# Altium PCB Sensor Interface.PcbDoc
Units mm, origin at the board's own origin, x right, y up, seen from the top; angles counter-clockwise.
Board outline 91 x 58 mm, 2 copper layers (Top Layer, Bottom Layer); 26 components, 19 nets, 82 pads, 24 vias.
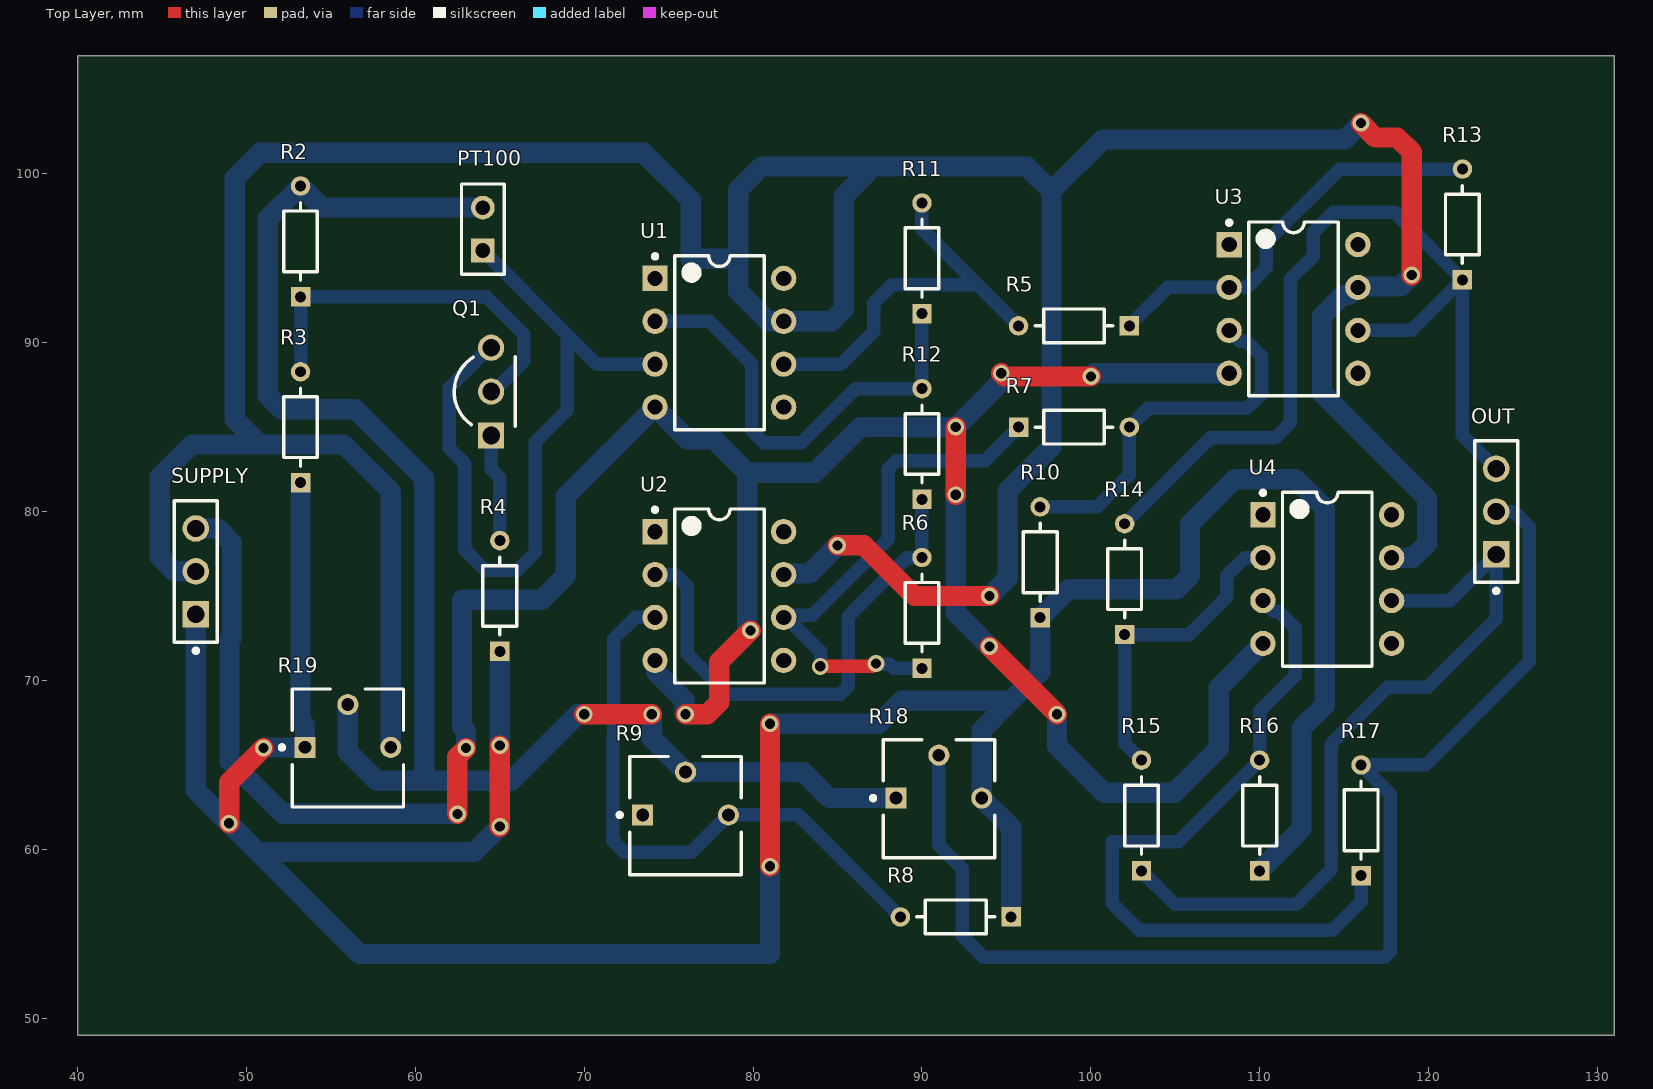
[diagram p0: Top Layer view]
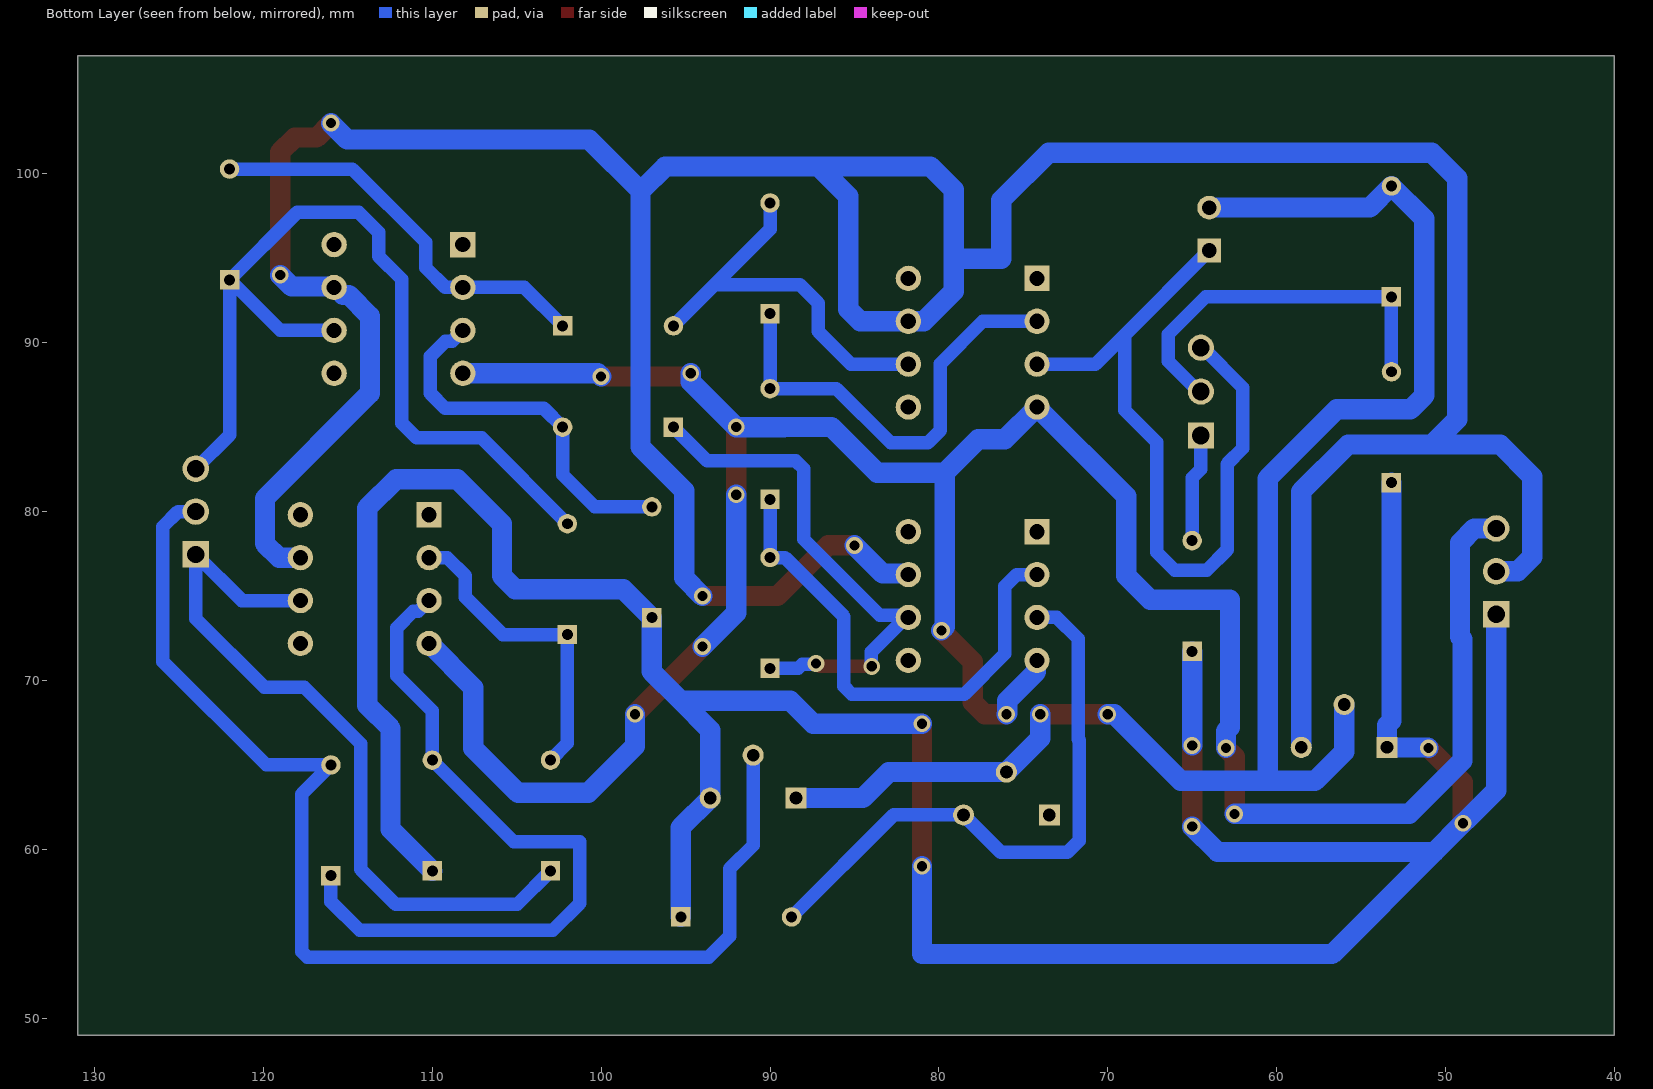
[diagram p1: Bottom Layer view, seen from below]

## Layer stack, top to bottom
Top Solder: solder mask 0.0102, Solder Resist, Dk 3.5
Top Layer: signal copper 0.0356
Dielectric 1: dielectric 0.32, FR-4, Dk 4.8
Bottom Layer: signal copper 0.0356
Bottom Solder: solder mask 0.0102, Solder Resist, Dk 3.5

## Board outline
40,49 131,49 131,107 40,107

## Design rules (kind name [scope] priority, off if disabled: settings)
Clearance [All] p1: gap=0.75 ignorepadtopadclearanceinfootprint=FALSE
PolygonConnect [All] p1: connectstyle=Relief reliefconductorwidth=0.254 reliefentries=4 polygonreliefangle="90 Angle" airgapwidth=0.254
RoutingVias [All] p1: holewidth=0.6 width=1 viastyle="Through Hole" minholewidth=0.6 minwidth=1 maxholewidth=0.6 maxwidth=1
SolderMaskExpansion [All] p1: expansion=0.102 istentingtop=FALSE
Width Width_Power [(InNet('-12') OR InNet('+5') OR InNet('+12') OR InNet('GND'))] p1: maxlimit=1.2 minlimit=1.2 preferedwidth=1.2
Width [All] p2: maxlimit=0.9 minlimit=0.3 preferedwidth=0.3
30 further rules are at their usual default settings.

## Components (designator, comment, footprint, x,y, rotation, side; value= is the part's Value field where it differs from the comment)
OUT "SSQ-103-01-T-S" FP-SSQ-103-01-T-S-MFG 124,80 r90 top
PT100 "SLW-102-01-T-S" SMTC-SLW-102-01-X-S 64,95.46 r90 top
Q1 "PN2222ATF" FAIR-TO-92-3 64.486,87.104 r90 top
R2 "CF18JT2K20" FP-CF18-MFG 53.2,96 r90 top value=2kΩ
R3 "CF18JT2K20" FP-CF18-MFG 53.2,85 r90 top value=1kΩ
R4 "CF18JT2K20" FP-CF18-MFG 65,75 r90 top value=1kΩ
R5 "CF18JT2K20" FP-CF18-MFG 99,91 r180 top value=2.2kΩ
R6 "CF18JT2K20" FP-CF18-MFG 90,74 r90 top value=2.2kΩ
R7 "CF18JT2K20" FP-CF18-MFG 99,85 r0 top value=2.2kΩ
R8 "CF18JT2K20" FP-CF18-MFG 92,56 r180 top value=2.2kΩ
R9 "3362P-1-104LF" BOUR-3362P 76,62 r0 top
R10 "CF18JT2K20" FP-CF18-MFG 97,77 r90 top value=2.2kΩ
R11 "CF18JT2K20" FP-CF18-MFG 90,95 r90 top value=2.2kΩ
R12 "CF18JT2K20" FP-CF18-MFG 90,84 r90 top value=2.2kΩ
R13 "CF18JT2K20" FP-CF18-MFG 122,97 r90 top value=2.2kΩ
R14 "CF18JT2K20" FP-CF18-MFG 102,76 r90 top value=2.2kΩ
R15 "CF18JT2K20" FP-CF18-MFG 103,62 r90 top value=2.2kΩ
R16 "CF18JT2K20" FP-CF18-MFG 110,62 r90 top value=2.2kΩ
R17 "CF18JT2K20" FP-CF18-MFG 116,61.72 r90 top value=2.2kΩ
R18 "3362P-1-104LF" BOUR-3362P 91,63 r0 top
R19 "3362P-1-104LF" BOUR-3362P 56,66 r0 top
SUPPLY "SSQ-103-01-T-S" FP-SSQ-103-01-T-S-MFG 47,76.46 r90 top
U1 "LM741CN" N08E 78,90 r0 top
U2 "LM741CN" N08E 78,75 r0 top
U3 "LM741CN" N08E 112,92 r0 top
U4 "LM741CN" N08E 114,76 r0 top

## Footprints (in the part's own frame and the unit in brackets; to place one, negate y for a bottom-side part, rotate by r counter-clockwise, add the part's x,y. Pads: shape width x height; smd on the part's side, far side on the other; paste and mask are expansions set on the pad)
BOUR-3362P [mm] "THD, 3-Leads, Body 6.6x6.99mm, Pitch 2.54mm"
  rect 1.25x1.25 hole 0.75: 1(-2.54,0.035)
  round 1.25 hole 0.75: 2(0,2.575) 3(2.54,0.035)
  silkscreen extent -4.02,-3.5 3.3,3.5, body extent -3.3,-3.49 3.3,3.49, height 4.95
FAIR-TO-92-3 [mm] "TO, 3-Leads, Body Dia 4.79mm, Pitch 2.6mm"
  rect 1.55x1.55 hole 1.05: 1(-2.6,0)
  round 1.55 hole 1.05: 2(0,0) 3(2.6,0)
  silkscreen extent -2.07,-1.43 2.07,2.19, body extent -2.4,-1.47 2.4,2.2, height 8.49
FP-CF18-MFG [mm]
  rect 1.15x1.15 hole 0.65 paste-1000 mask+0: 1(-3.28,0)
  round 1.15 hole 0.65 paste-1000 mask+0: 2(3.28,0)
  silkscreen extent -2.31,-1 2.3,1
FP-SSQ-103-01-T-S-MFG [mm]
  rect 1.57x1.57 hole 1.02 paste-1000 mask+0: 1(-2.54,0)
  round 1.57 hole 1.02 paste-1000 mask+0: 2(0,0) 3(2.54,0)
  silkscreen extent -4.82,-1.27 4.19,1.27, body extent -4.29,-1.37 4.29,1.37, height 0.25
N08E [mm] "DIP, 8-Pin, Row Spacing 7.62 mm, Pitch 2.54 mm"
  rect 1.5x1.5 hole 0.9: 1(-3.81,3.81)
  round 1.5 hole 0.9: 2(-3.81,1.27) 3(-3.81,-1.27) 4(-3.81,-3.81) 5(3.81,-3.81) 6(3.81,-1.27) 7(3.81,1.27) 8(3.81,3.81)
  silkscreen extent -3.93,-5.15 2.65,5.23, body extent -3.6,-5.15 3.6,5.15, height 5.33
SMTC-SLW-102-01-X-S [mm] "Low Profile Socket Strip, 1x2 Pins, Vertical, 2.54mm Pitch, Female"
  rect 1.4x1.4 hole 0.86: 1(0,0)
  round 1.4 hole 0.86: 2(2.54,0)
  silkscreen extent -1.39,-1.27 3.94,1.27, body extent -1.27,-1.27 3.81,1.27, height 4.57

## Part data
OUT SUPPLY: library part CMP-02766-001396-1, "CONN RCPT 3POS 0.1 TIN PCB", Color=Black, Contact Resistance=10mR, Max Current Rating=7.6A, Max Operating Temperature=105°C, Max Voltage Rating (AC)=550V, Min Operating Temperature=-55°C, Connector Type=Receptacle, Contact Material=Bronze, Contact Plating=Tin, Contact Type="Female Socket", Gender=Female, Height=8.51mm, Housing Color=Black, Housing Material=Plastic, Lead Free="Lead Free", Length=8.13mm, Mount="Through Hole", Number Of Contacts=3, Number of Positions=3, Number Of Rows=1, Orientation=Straight, Packaging=Bulk, Pitch=2.54mm, Radiation Hardening=No, RoHS Compliant=Yes, Series=SSQ, Termination=Solder, Width=2.41mm
PT100: library part CMP-1023-00124-1, "Low Profile Socket Strips, Through-hole, Vertical, -55 to 105 degC, 2.54 mm Pitch, 2-Pin, Female, RoHS", Manufacturer=Samtec, Temperature Range="-55 to 105 degC", ComponentLink1Description="Manufacturer URL", ComponentLink1URL=http://www.samtec.com, ComponentLink2Description=Datasheet, ComponentLink2URL=http://www.samtec.com/documents/webfiles/pdf/SLW.PDF, ComponentLink3Description="Package Specification", ComponentLink3URL=http://www.samtec.com/documents/webfiles/cpdf/SLW-1XX-01-X-X-MKT.pdf, DatasheetVersion=F-214, Mounting Technology=Through-hole, Orientation=Vertical, PackageDescription="Low Profile Socket Strip", PackageReference=SLW-102-01-X-S, PackageVersion="X, 9/1987", PartNumber=SLW-102-01-T-S, Pitch="2.54 mm", RoHS=True
Q1: library part CMP-2000-06911-1, "NPN General-Purpose Amplifier, 40 V, -55 to 150 degC, 3-Pin TO-92, RoHS, Tape and Reel", Collector- Base Voltage VCBO=75V, Collector- Emitter Voltage VCEO Max=40V, Collector-Emitter Saturation Voltage=1V, DC Current Gain hFE Max=300, Emitter- Base Voltage VEBO=6V, Manufacturer=FairchildSemiconductor, Maximum DC Collector Current=1A, Maximum Operating Temperature=+150C, Maximum Power Dissipation=625mW, Minimum Operating Temperature=-55C, Package / Case=TO-92-3KinkedLead, Package Description="3-Pin Transistor Outline Package, Body Dia 4.79 mm, Pitch 2.6 mm", Package Reference=TO-92, <PCN>=http://www.mouser.com/PCN/3.26.10LTBDFairchild.pdf, Brand=FairchildSemiconductor, Configuration=Single, Datasheet URL=https://www.fairchildsemi.com/datasheets/PN/PN2222A.pdf, Datasheet Version="Rev. 1.1.0, 07/2014", DC Collector/Base Gain hfe Min=100, Factory Pack Quantity=2000, Gain Bandwidth Product fT=300MHz, Manufacturer URL=https://www.fairchildsemi.com/, Mounting Style=ThroughHole, Mounting Technology=ThroughHole, Packaging=Reel, Product Category=BipolarTransistors-BJT, RoHS=Details, Series=PN2222, Transistor Polarity=NPN, Unit Weight=0.008466oz
R2 R5 R6 R7 R10 R11 R13 R14 R15 R16 R17: library part CMP-26528-000001-1, "RES 2.2K OHM 1/8W 5% CF AXIAL", Manufacturer="Stackpole Electronics Inc", Package=CF18, Power Rating=0.125W, Resistance=2kΩ, Temperature="-55°C to +155°C", Temperature Coefficient=0/-400ppm/°C, Temperature Range High=+155°C, Temperature Range Low=-55°C, Tolerance=5%, Voltage Rating=250V, Automotive=No, Category=Res, ComponentLink2Description=Datasheet, ComponentLink2URL=https://www.seielect.com/catalog/sei-cf_cfm.pdf, Composition="Carbon Film", Device Class L1="Passive Components", Device Class L2=Resistors, Device Class L3="Through-Hole Resistors", Digikey Description="RES 2.2K OHM 1/8W 5% CF AXIAL", Height=2mm, Ipc Land Pattern Name=RESAD656W65L360D200, Lead Free=Yes, Manufacturer Part Number=CF18JT2K20, Octopart=https://octopart.com/cf18jt2k20-stackpole+electronics-19205714, RoHS=TRUE, Series=CF
R3: library part CMP-26528-000001-1, "RES 2.2K OHM 1/8W 5% CF AXIAL", Manufacturer="Stackpole Electronics Inc", Package=CF18, Power Rating=0.125W, Resistance=1kΩ, Temperature="-55°C to +155°C", Temperature Coefficient=0/-400ppm/°C, Temperature Range High=+155°C, Temperature Range Low=-55°C, Tolerance=5%, Voltage Rating=250V, Automotive=No, Category=Res, ComponentLink2Description=Datasheet, ComponentLink2URL=https://www.seielect.com/catalog/sei-cf_cfm.pdf, Composition="Carbon Film", Device Class L1="Passive Components", Device Class L2=Resistors, Device Class L3="Through-Hole Resistors", Digikey Description="RES 2.2K OHM 1/8W 5% CF AXIAL", Height=2mm, Ipc Land Pattern Name=RESAD656W65L360D200, Lead Free=Yes, Manufacturer Part Number=CF18JT2K20, Octopart=https://octopart.com/cf18jt2k20-stackpole+electronics-19205714, RoHS=TRUE, Series=CF
R4: library part CMP-26528-000001-1, "RES 2.2K OHM 1/8W 5% CF AXIAL", Manufacturer="Stackpole Electronics Inc", Package=CF18, Power Rating=0.125W, Resistance=2.2kΩ, Temperature="-55°C to +155°C", Temperature Coefficient=0/-400ppm/°C, Temperature Range High=+155°C, Temperature Range Low=-55°C, Tolerance=5%, Voltage Rating=250V, Automotive=No, Category=Res, ComponentLink2Description=Datasheet, ComponentLink2URL=https://www.seielect.com/catalog/sei-cf_cfm.pdf, Composition="Carbon Film", Device Class L1="Passive Components", Device Class L2=Resistors, Device Class L3="Through-Hole Resistors", Digikey Description="RES 2.2K OHM 1/8W 5% CF AXIAL", Height=2mm, Ipc Land Pattern Name=RESAD656W65L360D200, Lead Free=Yes, Manufacturer Part Number=CF18JT2K20, Octopart=https://octopart.com/cf18jt2k20-stackpole+electronics-19205714, RoHS=TRUE, Series=CF
R8: library part CMP-26528-000001-1, "RES 2.2K OHM 1/8W 5% CF AXIAL", Manufacturer="Stackpole Electronics Inc", Package=CF18, Power Rating=0.125W, Resistance=10kΩ, Temperature="-55°C to +155°C", Temperature Coefficient=0/-400ppm/°C, Temperature Range High=+155°C, Temperature Range Low=-55°C, Tolerance=5%, Voltage Rating=250V, Automotive=No, Category=Res, ComponentLink2Description=Datasheet, ComponentLink2URL=https://www.seielect.com/catalog/sei-cf_cfm.pdf, Composition="Carbon Film", Device Class L1="Passive Components", Device Class L2=Resistors, Device Class L3="Through-Hole Resistors", Digikey Description="RES 2.2K OHM 1/8W 5% CF AXIAL", Height=2mm, Ipc Land Pattern Name=RESAD656W65L360D200, Lead Free=Yes, Manufacturer Part Number=CF18JT2K20, Octopart=https://octopart.com/cf18jt2k20-stackpole+electronics-19205714, RoHS=TRUE, Series=CF
R9 R18 R19: library part CMP-1747-00003-1, "Square Trimpot(R) Trimming Potentiometer, 100 KOhm, 300 V, -55 to 125 degC, 3-Pin THD, RoHS, Tube", Case\Package=Axial, Max Operating Temperature="155 degC", Min Operating Temperature="-55 degC", Package Quantity=200, Power Rating="250 mW", Resistance="1 mohm", Tolerance=1%, Voltage Rating="250 V", ComponentLink1Description="Manufacturer URL", ComponentLink1URL=http://www.bourns.com/, ComponentLink2Description=Datasheet, ComponentLink2URL=http://www.bourns.com/docs/Product-Datasheets/3362.pdf, DatasheetVersion=May-16, Length="0.248 inch", Mount="Through Hole", PackageDescription="3-Pin Through Hole Device, Body 6.6 x 6.99 mm, Pitch 2.54 mm", PackageReference=3326P, Packaging=Bulk, RoHSCompliant=true
R12: library part CMP-26528-000001-1, "RES 2.2K OHM 1/8W 5% CF AXIAL", Manufacturer="Stackpole Electronics Inc", Package=CF18, Power Rating=0.125W, Resistance=70Ω, Temperature="-55°C to +155°C", Temperature Coefficient=0/-400ppm/°C, Temperature Range High=+155°C, Temperature Range Low=-55°C, Tolerance=5%, Voltage Rating=250V, Automotive=No, Category=Res, ComponentLink2Description=Datasheet, ComponentLink2URL=https://www.seielect.com/catalog/sei-cf_cfm.pdf, Composition="Carbon Film", Device Class L1="Passive Components", Device Class L2=Resistors, Device Class L3="Through-Hole Resistors", Digikey Description="RES 2.2K OHM 1/8W 5% CF AXIAL", Height=2mm, Ipc Land Pattern Name=RESAD656W65L360D200, Lead Free=Yes, Manufacturer Part Number=CF18JT2K20, Octopart=https://octopart.com/cf18jt2k20-stackpole+electronics-19205714, RoHS=TRUE, Series=CF
U1 U2 U3 U4: library part CMP-0055-00155-2, "Operational Amplifier, 8-pin MDIP", Manufacturer="National Semiconductor", PackageTopMarking=NSUZXYTTE#*LM*741CN, PowerWise=N, Code_JEDEC=MS-001-BA, ComponentLink1Description="LM741 Datasheet", ComponentLink1URL=http://www.national.com/ds/LM/LM741.pdf, ComponentLink2Description="LM741 Web Page", ComponentLink2URL=http://www.national.com/pf/LM/LM741.html, ComponentLink3Description="N08E Package Page", ComponentLink3URL=http://www.national.com/packaging/folders/n08e.html, CompType=Amplifiers, DatasheetVersion=Aug-2000, PackageDescription="MDIP, .365 x .250 x .130in, 8 Lead, .100in Pitch", PackageReference=N08E, PackageVersion="revG, May-2006", PinCount=8, RevisionNote="Component URLs added", RoHS=N

## Via types
v1: diameter 1, hole 0.6, Top Layer to Bottom Layer, 24 vias

## Nets (pads, with @x,y where several pads share a name; then routed paths per layer and width w, separated by ;. In a path a pad name is that pad's centre, name@x,y a point inside that pad or via, vN(x,y) a via of type N, cw(c..) or ccw(c..) an arc to the next point about the centre after c; other vN are vias at no path point)
+5: PT100.2 R2.2 R9.2 R18.1 R19.2 | length 93.5
  Top Layer w1.2: v1(70,68) v1(74,68)
  Bottom Layer w1.2: R19.2 56,65.782 57.723,64.059 65.673,64.059 69.615,68 v1(70,68) ; 60.528,64.77 60.528,81.966 56.439,86.055 52.07,86.055 51.257,86.868 51.257,97.337 R2.2 54.48,98 PT100.2 ; v1(74,68) 74,66.575 R9.2 82.966,64.575 84.506,63.035 R18.1
+12: R19.3 SUPPLY.2 U1.7 U2.7 U3.7 U4.7 | length 226.4
  Top Layer w1.2: v1(85,78) 86.558,78 89.558,75 v1(94,75) ; v1(116,103) 116.851,102.149 118.149,102.149 119,101.297 v1(119,94)
  Bottom Layer w1.2: SUPPLY.2 45.72,76.46 44.856,77.324 44.856,82.067 46.761,83.972 50.8,83.972 ; R19.3 58.54,81.196 55.764,83.972 50.8,83.972 ; U2.7 81.867,76.327 83.327,76.327 v1(85,78) ; v1(94,75) 95.072,76.072 95.072,81.229 97.663,83.82 97.663,98.984 ; U3.7@115.289,92.83 114.94,92.83 113.69,91.58 113.69,86.995 119.91,80.775 119.91,78.105 119.075,77.27 U4.7 ; U3.7 115.867,93.327 118.327,93.327 v1(119,94) ; v1(116,103) 115.03,102.03 100.709,102.03 97.663,98.984 ; 50.8,83.972 49.301,85.471 49.301,99.746 50.8,101.244 73.508,101.244 76.302,98.45 76.302,94.978 79.121,94.978 ; 79.121,94.978 79.121,99.06 80.493,100.432 87.122,100.432 ; 79.121,94.978 79.121,93.04 80.891,91.27 U1.7 84.658,91.27 85.369,91.981 85.369,98.679 87.122,100.432 ; 87.122,100.432 96.215,100.432 97.663,98.984
-12: SUPPLY.3 U1.4 U2.4 U3.4 U4.4 | length 161.8
  Top Layer w1.2: v1(62.484,62.103) 62.484,65.484 v1(63,66) ; v1(76,68) 77.297,68 78,68.703 78,71.109 v1(79.855,72.963) ; v1(92,81) v1(92,85) ; v1(94,72) v1(98,68) ; v1(94.692,88.19) 94.882,88 v1(100,88)
  Bottom Layer w1.2: SUPPLY.3 48.297,79 49.135,78.162 49.135,72.576 49,72.441 49,65.242 52.139,62.103 v1(62.484,62.103) ; v1@63,66.009 63,67 62.763,67.237 62.763,74.778 67.488,74.778 68.91,76.2 68.91,80.91 U1.4 76.103,84.277 77.673,84.277 79.654,82.296 ; U2.4 74.247,71.133 74.247,70.51 75.95,68.808 75.95,68.05 v1(76,68) ; v1(79.855,72.963) 79.654,73.164 79.654,82.296 ; v1(92,81) 92,74 v1(94,72) ; v1(94.692,88.19) 94.692,87.692 v1(92,85) 89.171,85 89.157,85.014 86.36,85.014 83.668,82.321 83.668,82.296 79.654,82.296 ; v1(98,68) 98,66.109 100.762,63.348 104.927,63.348 107.569,65.989 107.569,69.569 U4.4 ; v1(100,88) 100.19,88.19 U3.4
GND: R3.1 R4.1 R8.1 R10.1 R16.1 R18.3 R19.1 SUPPLY.1 | length 193.9
  Top Layer w1.2: v1(48.971,61.544) 48.971,63.971 v1(51,66) ; v1(65,61.342) v1(65,66.143) ; v1(81,59) v1(81,67.438)
  Bottom Layer w1.2: SUPPLY.1 47,63.5 50.658,59.842 50.673,59.842 ; v1@48.971,61.546 v1(48.971,61.544) 50.673,59.842 ; v1(51,66) 51.03,66.03 53.455,66.03 R19.1 53.46,67.355 53.2,67.614 R3.1 ; v1(65,61.342) 63.5,59.842 50.673,59.842 ; v1(65,66.143) R4.1 ; v1(81,59) 81,53.797 56.718,53.797 50.673,59.842 ; v1(81,67.438) 87.438,67.438 88.795,68.795 95.269,68.795 ; R8.1 95.28,61.295 R18.3 93.54,67.064 95.27,68.794 97,70.524 R10.1 98.685,75.405 105.08,75.405 105.875,76.2 105.875,79.281 108.509,81.915 112.141,81.915 113.843,80.213 113.843,68.529 112.471,67.158 112.471,61.191 R16.1
NetOUT_1: OUT.1 R15.1 U4.6 | length 44.3
  Bottom Layer w0.8: R15.1 104.967,56.753 112.176,56.753 114.232,58.809 114.232,66.251 117.577,69.596 119.936,69.596 124,73.66 OUT.1 121.27,74.73 U4.6
NetOUT_2: OUT.2 R17.2 R18.2 | length 71.9
  Bottom Layer w0.8: R18.2 91,60.239 92.395,58.844 92.395,54.849 93.624,53.619 117.4,53.619 117.729,53.949 117.729,63.271 R17.2 119.839,65 125.959,71.12 125.959,79.096 125.054,80 OUT.2
NetOUT_3: OUT.3 R13.1 R14.2 U3.6 | length 54.5
  Bottom Layer w0.8: R14.2 107.078,84.358 110.927,84.358 111.811,85.242 111.811,93.751 113.182,95.123 113.182,96.545 114.351,97.714 118.006,97.714 R13.1 ; U3.6 119.01,90.73 R13.1 ; OUT.3 122,84.54 R13.1
NetPT100_1: PT100.1 Q1.3 U1.3 | length 45.2
  Bottom Layer w0.8: PT100.1 69,90.46 ; Q1.3 64.364,89.704 62,87.34 62,83.754 62.936,82.818 62.936,77.729 64.135,76.53 66.04,76.53 67.107,77.597 67.107,84.107 69,86 69,90.46 ; U1.3 70.73,88.73 69,90.46
NetQ1_1: Q1.1 R4.2 | length 6.4
  Bottom Layer w0.8: Q1.1 64.486,82.514 65,82 R4.2
NetQ1_2: Q1.2 R2.1 R3.2 | length 22.8
  Bottom Layer w0.8: R3.2 R2.1 64.193,92.72 66.411,90.502 66.411,88.907 64.609,87.104 Q1.2
NetR5_1: R5.1 R13.2 U3.2 | length 24.4
  Bottom Layer w0.8: R5.1 104.55,93.27 U3.2 109.22,93.27 110.39,94.44 110.39,95.945 114.725,100.28 R13.2
NetR5_2: R5.2 R11.2 U1.6 | length 24.1
  Bottom Layer w0.8: U1.6 85.204,88.73 87.14,90.666 87.14,92.347 88.24,93.447 93.273,93.447 ; R11.2 90,96.72 93.273,93.447 ; R5.2 93.273,93.447
NetR6_1: R6.1 R7.1 U2.6 | length 31.3
  Top Layer w0.8: v1(83.973,70.838) 87.057,70.838 87.219,71 v1(87.273,71)
  Bottom Layer w0.8: v1(83.973,70.838) 84,70.865 84,71.687 81.957,73.73 U2.6 81.944,73.864 83.508,73.864 88,78.356 88,82.531 88.469,83 93.72,83 R7.1 R7.1@95.72,84.863 ; v1(87.273,71) 87.312,70.962 88.092,70.962 88.334,70.72 R6.1
NetR6_2: R6.2 R12.1 U2.2 | length 30.3
  Bottom Layer w0.8: U2.2 75.393,76.27 76.098,75.565 76.098,71.577 78.488,69.188 85.155,69.188 85.623,69.657 85.623,73.787 89.116,77.28 R6.2 90,78.994 R12.1
NetR7_2: R7.2 R10.2 U3.3 | length 22.3
  Bottom Layer w0.8: R10.2 100.382,80.28 102.28,82.178 R7.2 103.388,86.108 109.222,86.108 110.109,86.995 110.109,89.205 109.22,90.094 108.826,90.094 U3.3
NetR8_2: R8.2 R9.3 U2.3 | length 35.7
  Bottom Layer w0.8: U2.3 73.019,73.73 71.75,72.461 71.75,66.524 71.685,66.459 71.685,60.522 72.39,59.817 76.322,59.817 R9.3 82.685,62.035 R8.2
NetR11_1: R11.1 R12.2 U1.2 | length 26.9
  Bottom Layer w0.8: U1.2 77.394,91.27 79.906,88.758 79.906,84.813 80.645,84.074 82.858,84.074 86.064,87.28 R12.2 90,88.832 R11.1
NetR14_1: R14.1 R15.2 U4.2 | length 18.7
  Bottom Layer w0.8: R15.2 102,66.28 R14.1 105.824,72.72 108.034,74.93 108.034,76.2 109.104,77.27 U4.2
NetR16_2: R16.2 R17.1 U4.3 | length 43.3
  Bottom Layer w0.8: U4.3 110.828,74.092 111.125,74.092 112.09,73.127 112.09,70.282 110,68.192 R16.2 105.172,60.452 101.27,60.452 101.27,56.794 102.861,55.203 114.3,55.203 116,56.903 R17.1
pads on no net: R9.1 U1.1 U1.5 U1.8 U2.1 U2.5 U2.8 U3.1 U3.5 U3.8 U4.1 U4.5 U4.8